# Altium PCB StepperMotorBoard.PcbDoc
Units mil, origin at the board's own origin, x right, y up, seen from the top; angles counter-clockwise.
Board outline 2660 x 2335 mil, 2 copper layers (Top Layer, Bottom Layer); 31 components, 36 nets, 143 pads, 21 vias.
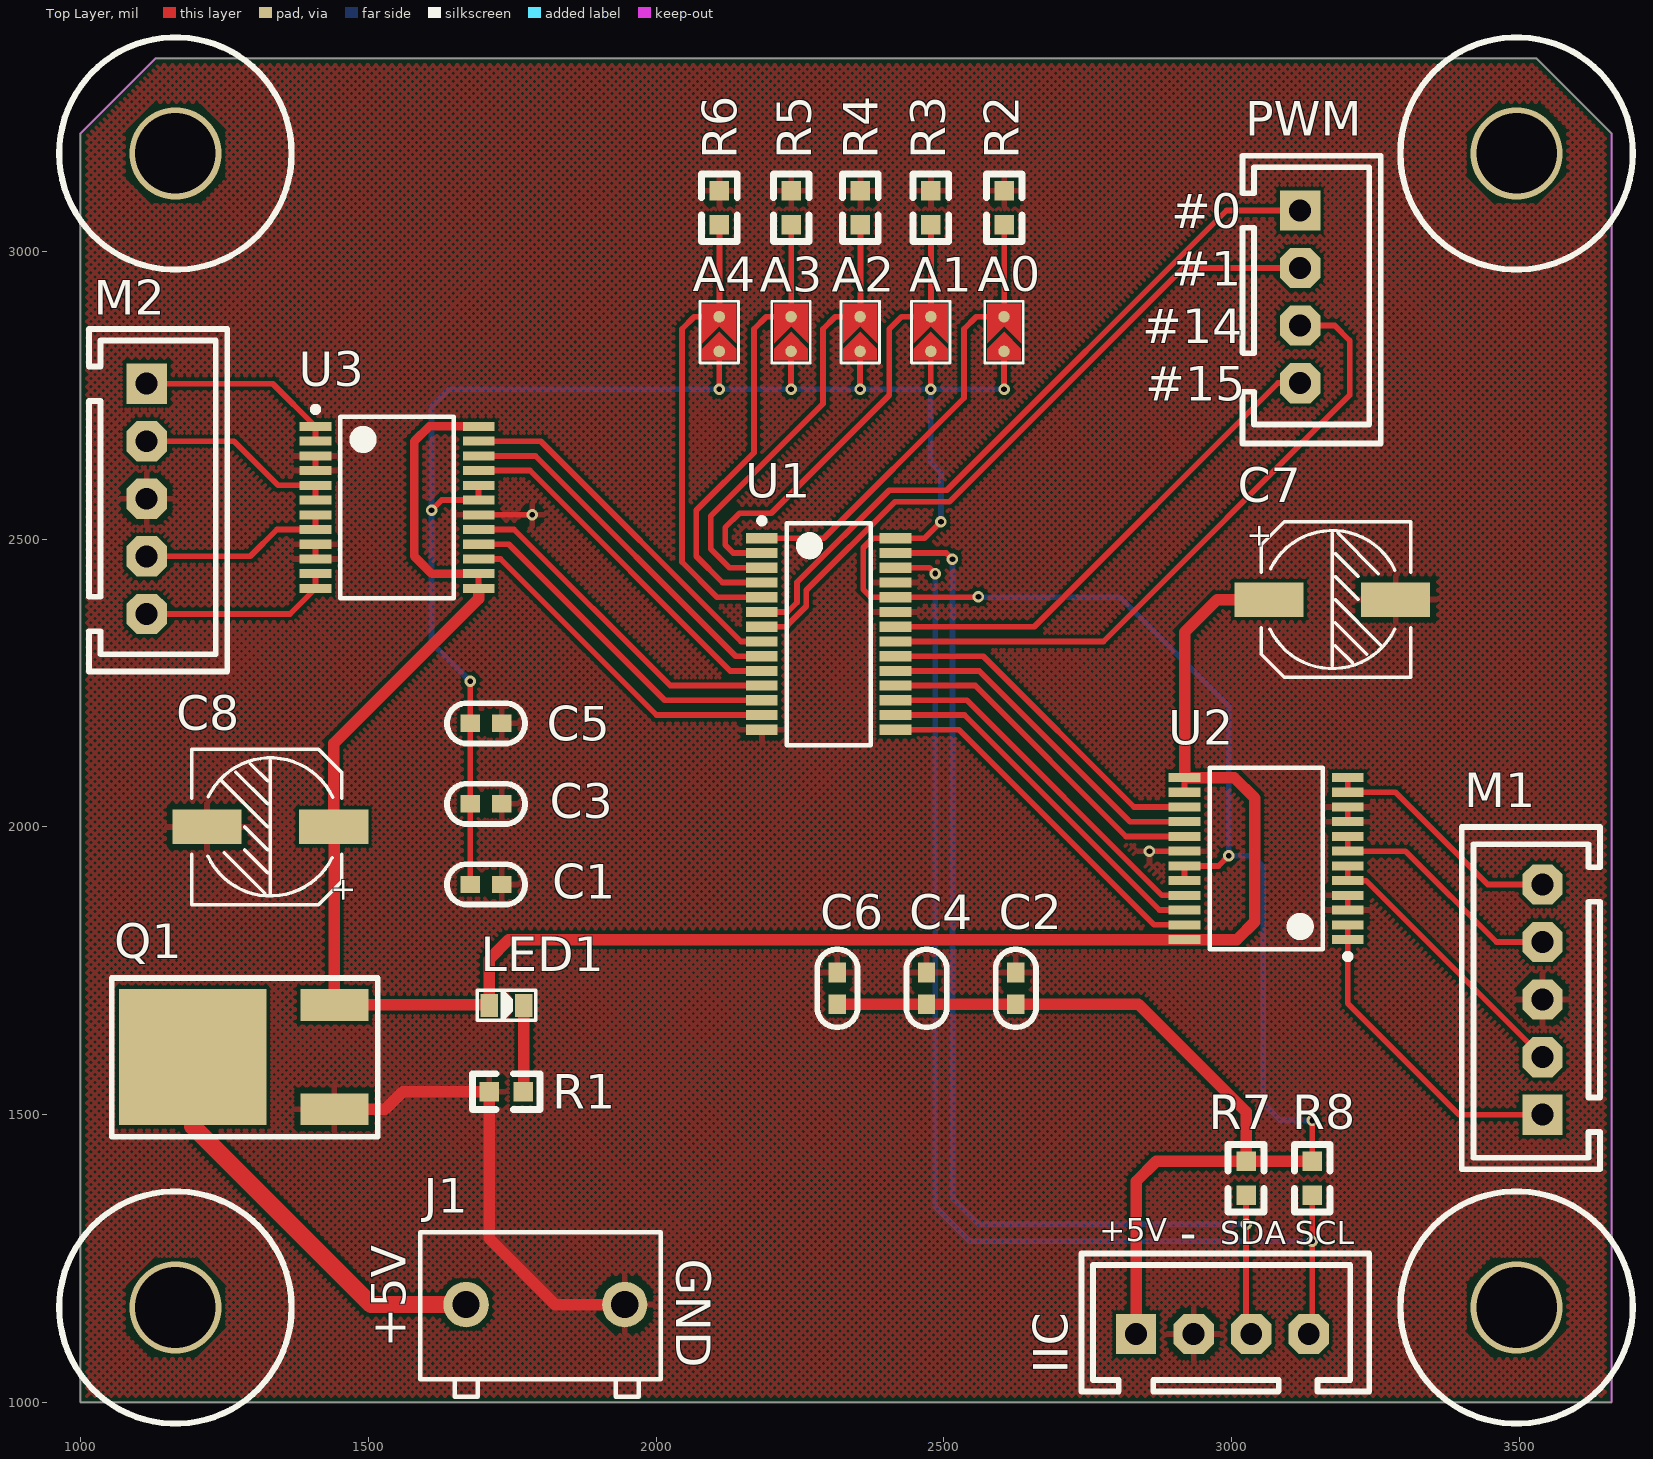
[diagram p0: Top Layer view]
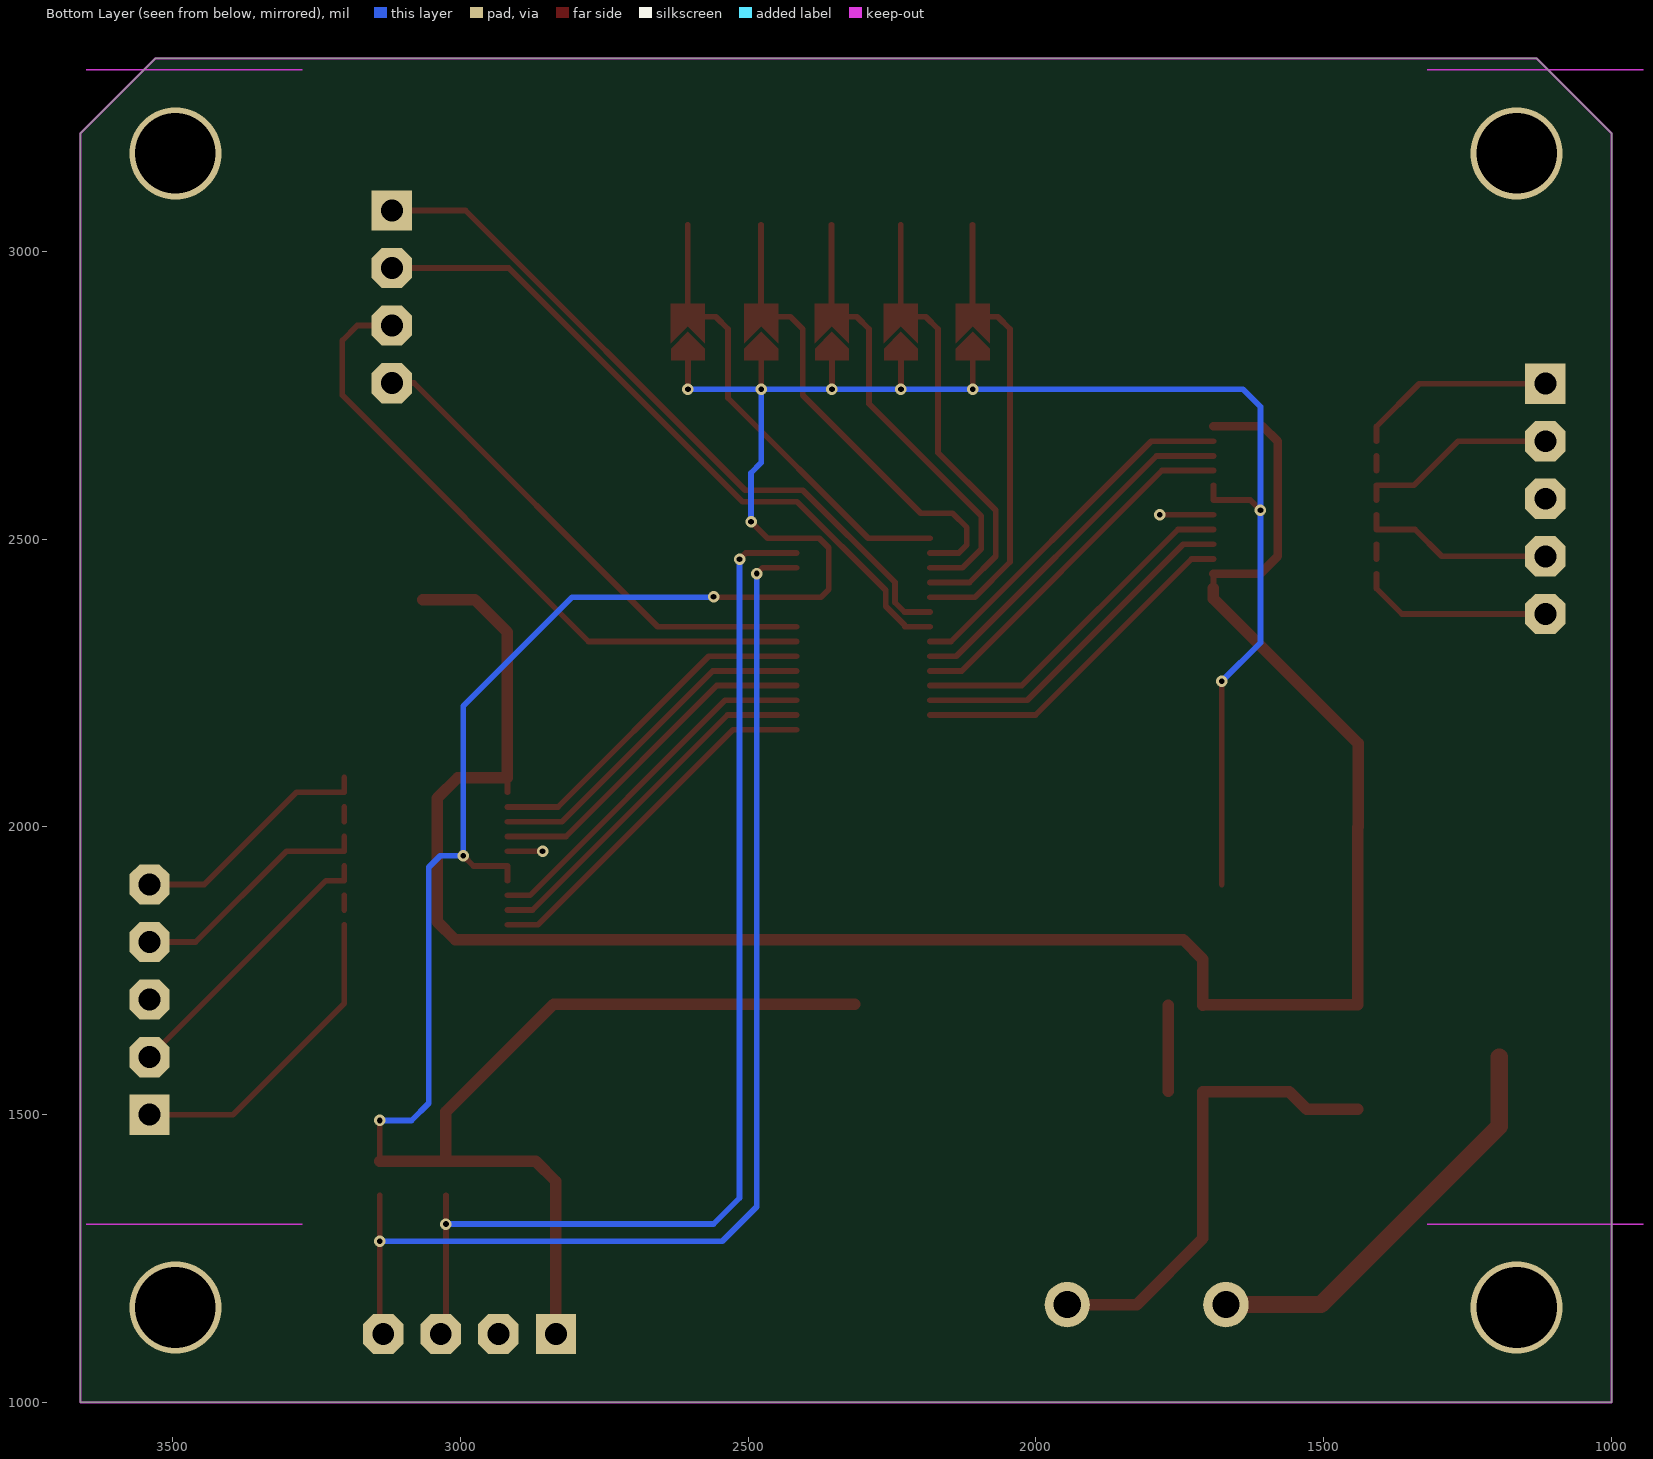
[diagram p1: Bottom Layer view, seen from below]

## Layer stack, top to bottom
Top Solder: solder mask 0.4, Solder Resist, Dk 3.5
Top Layer: signal copper 1.4
Dielectric 1: dielectric 12.6, FR-4, Dk 4.8
Bottom Layer: signal copper 1.4
Bottom Solder: solder mask 0.4, Solder Resist, Dk 3.5

## Board outline
1000,1000 1000,3205 1130,3335 3530,3335 3660,3205 3660,1000

## Design rules (kind name [scope] priority, off if disabled: settings)
Clearance [All] p1: gap=6
HoleSize [All] p1: absolutevalues=TRUE maxlimit=140 minlimit=1 maxpercent=80.000 minpercent=20.000
MinimumSolderMaskSliver [All] p1: minsoldermaskwidth=1
PolygonConnect [All] p1: connectstyle=Relief reliefconductorwidth=10 reliefentries=4 polygonreliefangle="90 Angle" airgapwidth=10
RoutingVias [All] p1: holewidth=28 width=50 viastyle="Through Hole" minholewidth=6 minwidth=50 maxholewidth=280 maxwidth=500
SilkToSilkClearance [All] p1: silktosilkclearance=5
SilkToSolderMaskClearance [IsPad] p1: minsilkscreentomaskgap=0 clearancetoexposedcopper=TRUE
SolderMaskExpansion [All] p1: expansion=4
Width [All] p1: maxlimit=1000 minlimit=6 preferedwidth=10
26 further rules are at their usual default settings.

## Components (designator, comment, footprint, x,y, rotation, side; value= is the part's Value field where it differs from the comment)
A0 "HEADER1" HEADER1 2575,2908.82 r0 top
A1 "HEADER1" HEADER1 2447.91,2908.82 r0 top
A2 "HEADER1" HEADER1 2325,2908.82 r0 top
A3 "HEADER1" HEADER1 2205,2908.82 r0 top
A4 "HEADER1" HEADER1 2080.24,2908.82 r0 top
C1 "100nF" 0603 1705,1900 r0 top
C2 "100nF" 0603 2625,1720 r90 top
C3 "100nF" 0603 1705,2040 r0 top
C4 "100nF" 0603 2470,1720 r90 top
C5 "10uF" 0603 1705,2180 r0 top
C6 "10uF" 0603 2315,1720 r90 top
C7 "47uF/50V" SMDEC-6MM(220MIL) 3065,2395 r90 top
C8 "47uF/50V" SMDEC-6MM(220MIL) 1440,2000 r270 top
IIC "Header 4" 2.54-4 3035,1120 r0 top
J1 "POWER" "Terminal block ED655" 1670,1170 r0 top
LED1 "LED" SMDLED-0603 1710,1690 r90 top
M1 "CON5_1" 2.54-5PMR 3540,1700 r90 top
M2 "CON5_1" 2.54-5PMR 1115,2570 r270 top
PWM "Header 4" 2.54-4 3120,2870 r270 top
Q1 "AOD417" TO-252 1195,1600 r90 top (schematic designator Q?)
R1 "1k" 0603P 1710,1540 r0 top
R2 "10k" 0603P 2605,3105 r270 top
R3 "10k" 0603P 2477.5,3105 r270 top
R4 "10k" 0603P 2355,3105 r270 top
R5 "10k" 0603P 2235,3105 r270 top
R6 "10k" 0603P 2110,3105 r270 top
R7 "10k" 0603P 3025,1360 r90 top
R8 "10k" 0603P 3140,1360 r90 top
U1 "PCA9685" TSOP65P640X110-28N 2300,2335 r0 top
U2 "TB6612FNG" SSOP65P760X160-24N 3060,1945 r180 top
U3 "TB6612FNG" SSOP65P760X160-24N 1550,2555 r0 top

## Footprints (in the part's own frame and the unit in brackets; to place one, negate y for a bottom-side part, rotate by r counter-clockwise, add the part's x,y. Pads: shape width x height; smd on the part's side, far side on the other; paste and mask are expansions set on the pad)
2.54-4 [mil]
  rect 70x70 hole 38: 1(-201,-1)
  oct 70x70 hole 38: 2(-101,-1) 3(-1,-1) 4(99,-1)
  silkscreen extent -296,-101 204,139
2.54-5PMR [mil]
  rect 70x70 hole 38: 1(-200,0)
  oct 70x70 hole 38: 2(-100,0) 3(0,0) 4(100,0) 5(200,0)
  silkscreen extent -295,-100 300,140
0603 [mil]
  rect 33.94x30 smd: 1(-28,0) 2(27,0)
  silkscreen extent -68,-35 67,35
0603P [mil]
  rect 33.94x33.94 smd: 1(0,0) 2(58.94,0)
  silkscreen extent -29,-31 88,31
HEADER1 [mil]
  round 20 smd paste+0 mask+0: 1(29.53,-82.68) 2(29.53,-22.44)
  Top Layer region: 0,0 59.06,0 59.06,-68.32 29.53,-38.98 0,-68.31
  Top Layer region: 29.53,-48.82 58.86,-78.15 58.86,-98.23 59.06,-98.43 0,-98.43 0,-78.35
  silkscreen extent -4,-103 63,4
SMDEC-6MM(220MIL) [mil]
  rect 60x120 smd: 1(0,0) 2(0,-220)
  silkscreen extent -135,-246 135,14
SMDLED-0603 [mil]
  rect 40x30 smd: 1(0,0) 2(0,-60)
  silkscreen extent -27,-81 27,21
SSOP65P760X160-24N [mm] "TSOP, 24-Leads, Body 7.80x5.60mm, Pitch 0.65mm, IPC Medium Density"
  rect 1.4x0.4 smd: 1(-3.6,3.575) 2(-3.6,2.925) 3(-3.6,2.275) 4(-3.6,1.625) 5(-3.6,0.975) 6(-3.6,0.325) 7(-3.6,-0.325) 8(-3.6,-0.975) 9(-3.6,-1.625) 10(-3.6,-2.275) 11(-3.6,-2.925) 12(-3.6,-3.575) 13(3.6,-3.575) 14(3.6,-2.925) 15(3.6,-2.275) 16(3.6,-1.625) 17(3.6,-0.975) 18(3.6,-0.325) 19(3.6,0.325) 20(3.6,0.975) 21(3.6,1.625) 22(3.6,2.275) 23(3.6,2.925) 24(3.6,3.575)
  silkscreen extent -3.73,-4 2.5,4.45, body extent -2.9,-4 2.9,4, height 1.6
"Terminal block ED655" [mm]
  round 2 hole 1.2: 1(0,0) 2(7,0)
  silkscreen extent -2.03,-4.06 8.59,3.2
TO-252 [mm]
  rect 6x6.5 smd: D(0,0)
  rect 1.4x3 smd: G(-2.3,-6.25) S(2.3,-6.25)
  silkscreen extent -3.51,-8.17 3.49,3.57, body extent -3.24,-6.91 3.3,3.03, height 2.41
TSOP65P640X110-28N [mm] "TSOP, 28-Leads, Body 9.70x4.40mm, Pitch 0.65mm, IPC Medium Density"
  rect 1.4x0.45 smd: 1(-2.95,4.225) 2(-2.95,3.575) 3(-2.95,2.925) 4(-2.95,2.275) 5(-2.95,1.625) 6(-2.95,0.975) 7(-2.95,0.325) 8(-2.95,-0.325) 9(-2.95,-0.975) 10(-2.95,-1.625) 11(-2.95,-2.275) 12(-2.95,-2.925) 13(-2.95,-3.575) 14(-2.95,-4.225) 15(2.95,-4.225) 16(2.95,-3.575) 17(2.95,-2.925) 18(2.95,-2.275) 19(2.95,-1.625) 20(2.95,-0.975) 21(2.95,-0.325) 22(2.95,0.325) 23(2.95,0.975) 24(2.95,1.625) 25(2.95,2.275) 26(2.95,2.925) 27(2.95,3.575) 28(2.95,4.225)
  silkscreen extent -3.07,-4.9 1.85,5.12, body extent -2.25,-4.9 2.25,4.9, height 1.1

## Part data
C1 C2 C3 C4 C5 C6: library part C
C7 C8: library part "Cap Pol1", "Polarized Capacitor (Radial)"
IIC PWM: "Header, 4-Pin"
J1: library part "Header 2_1", "TERMINAL BLOCK 2PIN 25A/300V GREEN 9.52mm PITCH 12-24AWG ROHS"
M1 M2: "Connector"
Q1: "P-Channel Enhancement Mode Field Effect Transistor"
R1 R2 R3 R4 R5 R6 R7 R8: library part R, "贴片电阻"
U1: "16-channel, 12-bit PWM Fm+ I2C-bus LED controller"
U2 U3: "IC MOTOR DRIVER PAR 24SSOP"

## Via types
v1: diameter 20, hole 10, Top Layer to Bottom Layer, 17 vias
v2: diameter 160, hole 140, Top Layer to Bottom Layer, 4 vias

## Nets (pads, with @x,y where several pads share a name; then routed paths per layer and width w, separated by ;. In a path a pad name is that pad's centre, name@x,y a point inside that pad or via, vN(x,y) a via of type N, cw(c..) or ccw(c..) an arc to the next point about the centre after c; other vN are vias at no path point)
A0: A0.2 R2.2 U1.1 | length 809.7
  Top Layer w10: U1.1 2291.34,2501.34 2535,2745 2535,2865 2556.38,2886.38 A0.2 ; A0.2@2605,2886.85 R2.2
A1: A1.2 R3.2 U1.2 | length 836
  Top Layer w10: U1.2 2134.25,2475.75 2120,2490 2120,2520 2145,2545 2200,2545 2405,2750 2405,2865 2426.38,2886.38 A1.2 ; A1.2@2477.5,2886.44 R3.2
A2: A2.2 R4.2 U1.3 | length 798
  Top Layer w10: U1.3 2127.53,2450.16 2095,2482.69 2095,2540 2290,2735 2290,2865 2311.38,2886.38 A2.2 ; A2.2@2355,2886.85 R4.2
A3: A3.2 R5.2 U1.4 | length 801.7
  Top Layer w10: U1.4 2115.43,2424.57 2070,2470 2070,2550 2170,2650 2170,2865 2191.38,2886.38 A3.2 ; A3.2@2235,2886.85 R5.2
A4: A4.2 R6.2 U1.5 | length 802.2
  Top Layer w10: A4.2 2066.38,2886.38 2045,2865 2045,2460 2106.02,2398.98 U1.5 ; A4.2@2110,2886.61 R6.2
GND: C1.2 C2.2 C3.2 C4.2 C5.2 C6.2 C7.2 C8.2 IIC.2 J1.2 M1.3 M2.3 Q1.G R1.1 R2.1 R3.1 R4.1 R5.1 R6.1 U1.14 U1.23 U1.25 U2.3 U2.4 U2.9 U2.10 U2.18 U3.3 U3.4 U3.9 U3.10 U3.18 | length 1076.5
  Top Layer w10: U3.10 U3.9 ; U3.4 U3.3 ; U3.18 v1(1785,2542.2) ; v1(2857.2,1957.8) U2.18 ; U2.3 U2.4 ; U2.9 U2.10
  Top Layer w20: Q1.G 1529.45,1509.45 1560,1540 R1.1 1710,1285 1825,1170 J1.2
NetJ1_1: J1.1 Q1.D | length 723.4
  Top Layer w30: Q1.D 1195,1480 1505,1170 J1.1
NetLED1_2: LED1.2 R1.2 | length 148.9
  Top Layer w20: R1.2@1770,1541.06 LED1.2
NetM1_1: M1.1 U2.1 U2.2 | length 554.9
  Top Layer w10: U2.2 U2.1 3201.73,1693.27 3395,1500 M1.1
NetM1_2: M1.2 U2.5 U2.6 | length 490.9
  Top Layer w10: U2.6 U2.5 3233.39,1906.61 M1.2
NetM1_4: M1.4 U2.7 U2.8 | length 429.2
  Top Layer w10: U2.8 U2.7 3302.2,1957.8 3460,1800 M1.4
NetM1_5: M1.5 U2.11 U2.12 | length 430.2
  Top Layer w10: U2.12 U2.11 3284.84,2060.16 3445,1900 M1.5
NetM2_1: M2.1 U3.1 U3.2 | length 349.6
  Top Layer w10: M2.1 1334.02,2770 U3.1 U3.2
NetM2_2: M2.2 U3.5 U3.6 | length 350.6
  Top Layer w10: M2.2 1266.77,2670 1343.39,2593.39 U3.5 U3.6
NetM2_4: M2.4 U3.7 U3.8 | length 338.2
  Top Layer w10: M2.4 1295,2470 1341.61,2516.61 U3.8 U3.7
NetM2_5: M2.5 U3.11 U3.12 | length 337.2
  Top Layer w10: M2.5 1364.02,2370 U3.12 U3.11
PWM0: PWM.1 U1.6 | length 1244.6
  Top Layer w10: U1.6 2228.39,2373.39 2245,2390 2245,2425 2405,2585 2505,2585 2991,3071 PWM.1
PWM1: PWM.2 U1.7 | length 1210.9
  Top Layer w10: U1.7 2227.8,2347.8 2227.8,2350.17 2261,2383.37 2261,2411 2415,2565 2510,2565 2916,2971 PWM.2
PWM2: U1.8 U3.23 | length 636.3
  Top Layer w10: U3.23 1799.84,2670.16 2147.8,2322.2 U1.8
PWM3: U1.9 U3.22 | length 636.3
  Top Layer w10: U3.22 1790.43,2644.57 2138.39,2296.61 U1.9
PWM4: U1.10 U3.21 | length 636.3
  Top Layer w10: U3.21 1781.02,2618.98 2128.98,2271.02 U1.10
PWM5: U1.11 U3.17 | length 604.5
  Top Layer w10: U3.17 1753.39,2516.61 2024.57,2245.43 U1.11
PWM6: U1.12 U3.16 | length 604.5
  Top Layer w10: U3.16 1743.98,2491.02 2015.16,2219.84 U1.12
PWM7: U1.13 U3.15 | length 604.5
  Top Layer w10: U3.15 1729.57,2465.43 2000.75,2194.25 U1.13
PWM8: U1.15 U2.23 | length 642.5
  Top Layer w10: U1.15 2526.34,2168.66 2865.16,1829.84 U2.23
PWM9: U1.16 U2.22 | length 642.5
  Top Layer w10: U1.16 2535.75,2194.25 2874.57,1855.43 U2.22
PWM10: U1.17 U2.21 | length 642.5
  Top Layer w10: U1.17 2540.16,2219.84 2878.98,1881.02 U2.21
PWM11: U1.18 U2.17 | length 610.7
  Top Layer w10: U1.18 2554.57,2245.43 2816.61,1983.39 U2.17
PWM12: U1.19 U2.16 | length 610.7
  Top Layer w10: U1.19 2561.35,2271.02 2823.4,2008.98 U2.16
PWM13: U1.20 U2.15 | length 610.7
  Top Layer w10: U1.20 2568.39,2296.61 2830.43,2034.57 U2.15
PWM14: PWM.3 U1.21 | length 1157.8
  Top Layer w10: U1.21 2777.2,2322.2 3205,2750 3205,2845 3179,2871 PWM.3
PWM15: PWM.4 U1.22 | length 878.2
  Top Layer w10: U1.22 2657.2,2347.8 3080.41,2771 PWM.4
SCL: IIC.4 R8.1 U1.26 | length 2087.9
  Top Layer w10: U1.26 2474.84,2450.16 v1(2485,2440) ; IIC.4@3140,1125 R8.1
  Bottom Layer w10: v1(2485,2440) 2485,1340 2545,1280 v1(3140,1280)
SDA: IIC.3 R7.1 U1.27 | length 1973.9
  Top Layer w10: U1.27 2504.25,2475.75 v1(2515,2465) ; IIC.3@3025,1128 v1(3025,1310) R7.1
  Bottom Layer w10: v1(2515,2465) 2515,1355 2560,1310 v1(3025,1310)
VCC_5V: A0.1 A1.1 A2.1 A3.1 A4.1 C1.1 C2.1 C3.1 C4.1 C5.1 C6.1 IIC.1 R7.2 R8.2 U1.24 U1.28 U2.19 U2.20 U3.19 U3.20 | length 5967.1
  Top Layer w10: v1(1610,2550) 1627.8,2567.8 U3.19 U3.20 ; C1.1 C3.1 C5.1 v1(1677,2253) ; v1(2109.76,2760.24) A4.1 ; v1(2234.53,2760.24) A3.1 ; v1(2354.53,2760.24) A2.1 ; v1(2477.44,2760.24) A1.1 ; v1(2495,2530) 2466.34,2501.34 U1.28 2376.34,2501.34 2360,2485 2360,2412.43 2373.45,2398.98 U1.24 v1@2560,2398.98 ; v1(2604.53,2760.24) A0.1 ; U2.20 U2.19 2977.2,1932.2 v1(2995,1950) ; R8.2 v1(3140,1490)
  Top Layer w20: C6.1 C4.1 C2.1 2838,1692 3025,1505 R7.2 ; IIC.1 2834,1384 2868.94,1418.94 R7.2 ; R8.2 R7.2
  Bottom Layer w10: v1(1677,2253) 1610,2320 v1(1610,2550) 1610,2730 1640.24,2760.24 v1(2109.76,2760.24) v1(2234.53,2760.24) v1(2354.53,2760.24) v1(2477.44,2760.24) ; v1(2495,2530) 2495,2615 2477.44,2632.56 v1(2477.44,2760.24) ; v1@2560,2398.98 2806.02,2398.98 2995,2210 v1(2995,1950) 3035,1950 3055,1930 3055,1520 3085,1490 v1(3140,1490) ; v1(2604.53,2760.24) v1(2477.44,2760.24)
  other v1: 2560,2400
VCC_12V: C7.1 C8.1 LED1.1 Q1.S U2.13 U2.14 U2.24 U3.13 U3.14 U3.24 | length 3804.3
  Top Layer w10: U3.13 U3.14 ; U2.14 U2.13
  Top Layer w15: U3.14 1610.16,2439.84 1580,2470 1580,2670 1605.75,2695.75 U3.24
  Top Layer w20: C8.1 1440,2145 1691.73,2396.73 U3.13 ; C8.1@1441.06,1998.94 Q1.S LED1.1@1709.45,1690.55 ; LED1.1 1710,1770 1744.25,1804.25 U2.24 3009.25,1804.25 3040,1835 3040,2050 3004.25,2085.75 U2.13 2918.27,2338.27 2975,2395 C7.1
copper on no net:
  other v2: 1165,1165 3495,1165 1165,3170 3495,3170

## Polygon pours and split planes (outlines as drawn)
GND on Top Layer "Top Layer-No Net" (hatched 45Degree grid 10 track 6, pour order 2): 1130,3335 1000,3205 1000,1000 3660,1000 3660,3205 3530,3335

## Keep-outs
Bottom Layer:
  rectangle: 3275,1310 3650,1310
  rectangle: 945,1310 1320,1310
  rectangle: 945,3315 1320,3315
  rectangle: 3275,3315 3650,3315
Top Overlay:
  circle w10: c3495,1165 r202.24
  circle w10: c1165,1165 r202.24
  circle w10: c1165,3170 r202.24
  circle w10: c3495,3170 r202.24
Keep-Out Layer:
  the board outline again, w3.94

## Silkscreen, mask and mechanical layers (free items; w line width, h text height)
Top Overlay:
  circle w10: c3495,1165 r201.56
  circle w10: c1165,1165 r201.56
  circle w10: c1165,3170 r201.56
  circle w10: c3495,3170 r201.56
  text "#0" at 2895,3040 h60
  text "#1" at 2895,2940 h60
  text "#14" at 2845,2840 h60
  text "#15" at 2850,2740 h60
  text "+5V" at 2770,1280 h40
  text "SDA" at 2980,1275 h40
  text "SCL" at 3110,1275 h40
  text "-" at 2910,1265 h60
  text "GND" at 2035,1250 h60 r270
  text "+5V" at 1565,1095 h60 r90

## Text inside footprints (layer, text, board x,y; h text height)
C7: Top Overlay "+" at 3065,2528 h40 r90
C8: Top Overlay "+" at 1440,1867 h40 r270